# EAGLE board carte_alim (EAGLE 6.5.0)
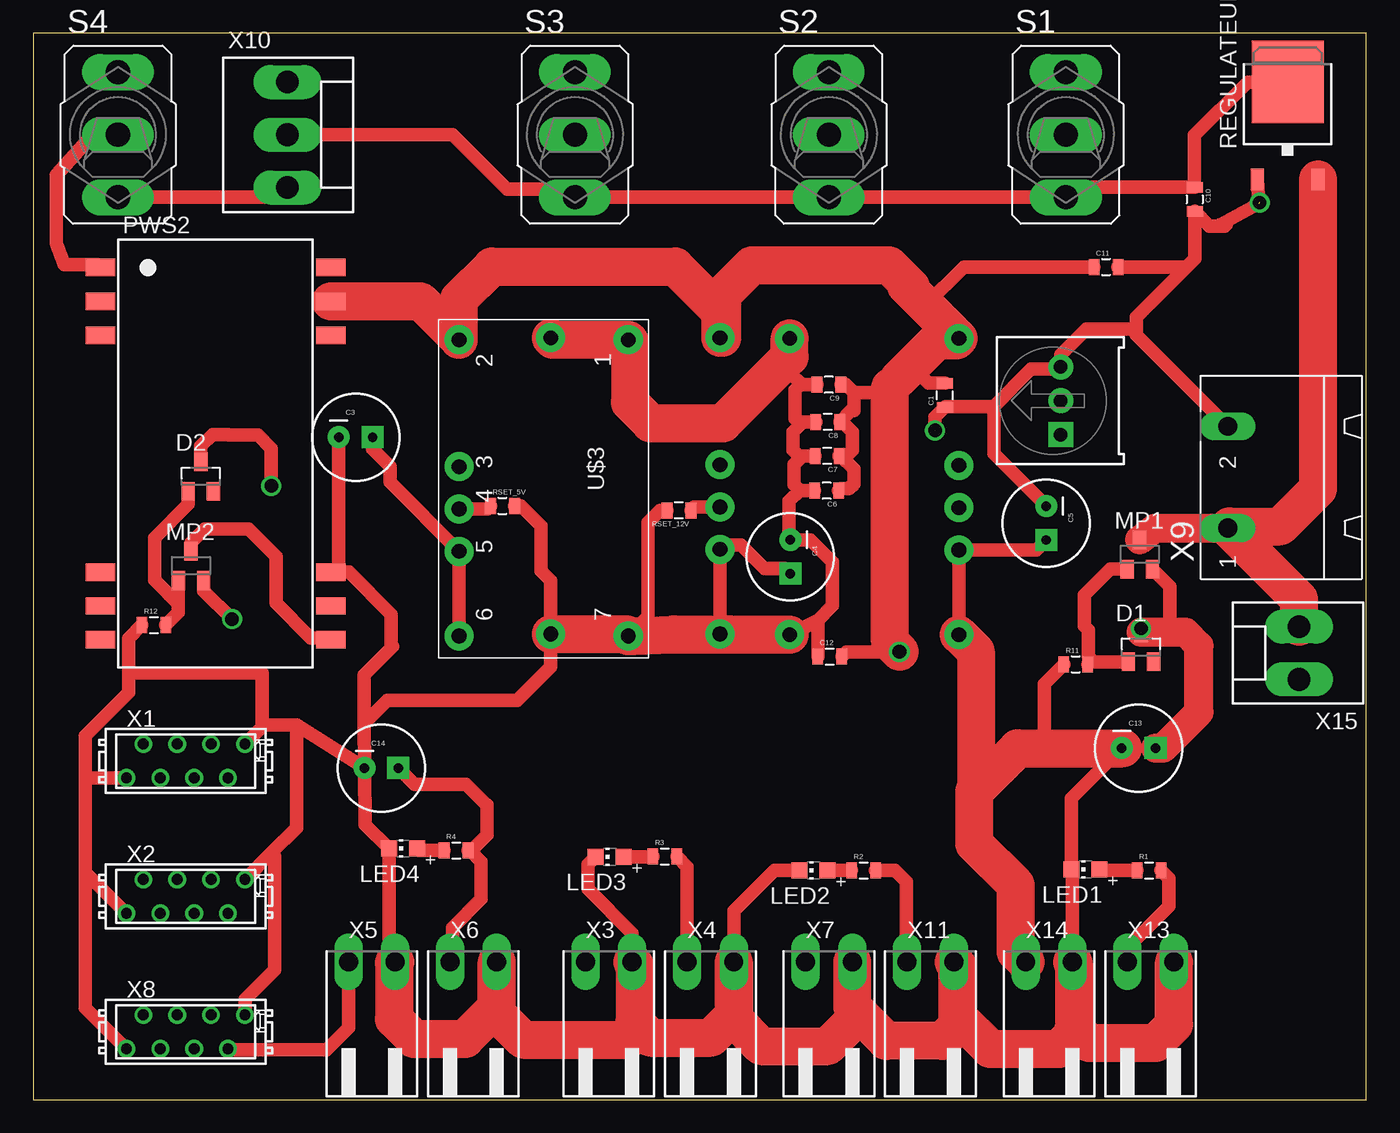
[diagram p0: board, top side]
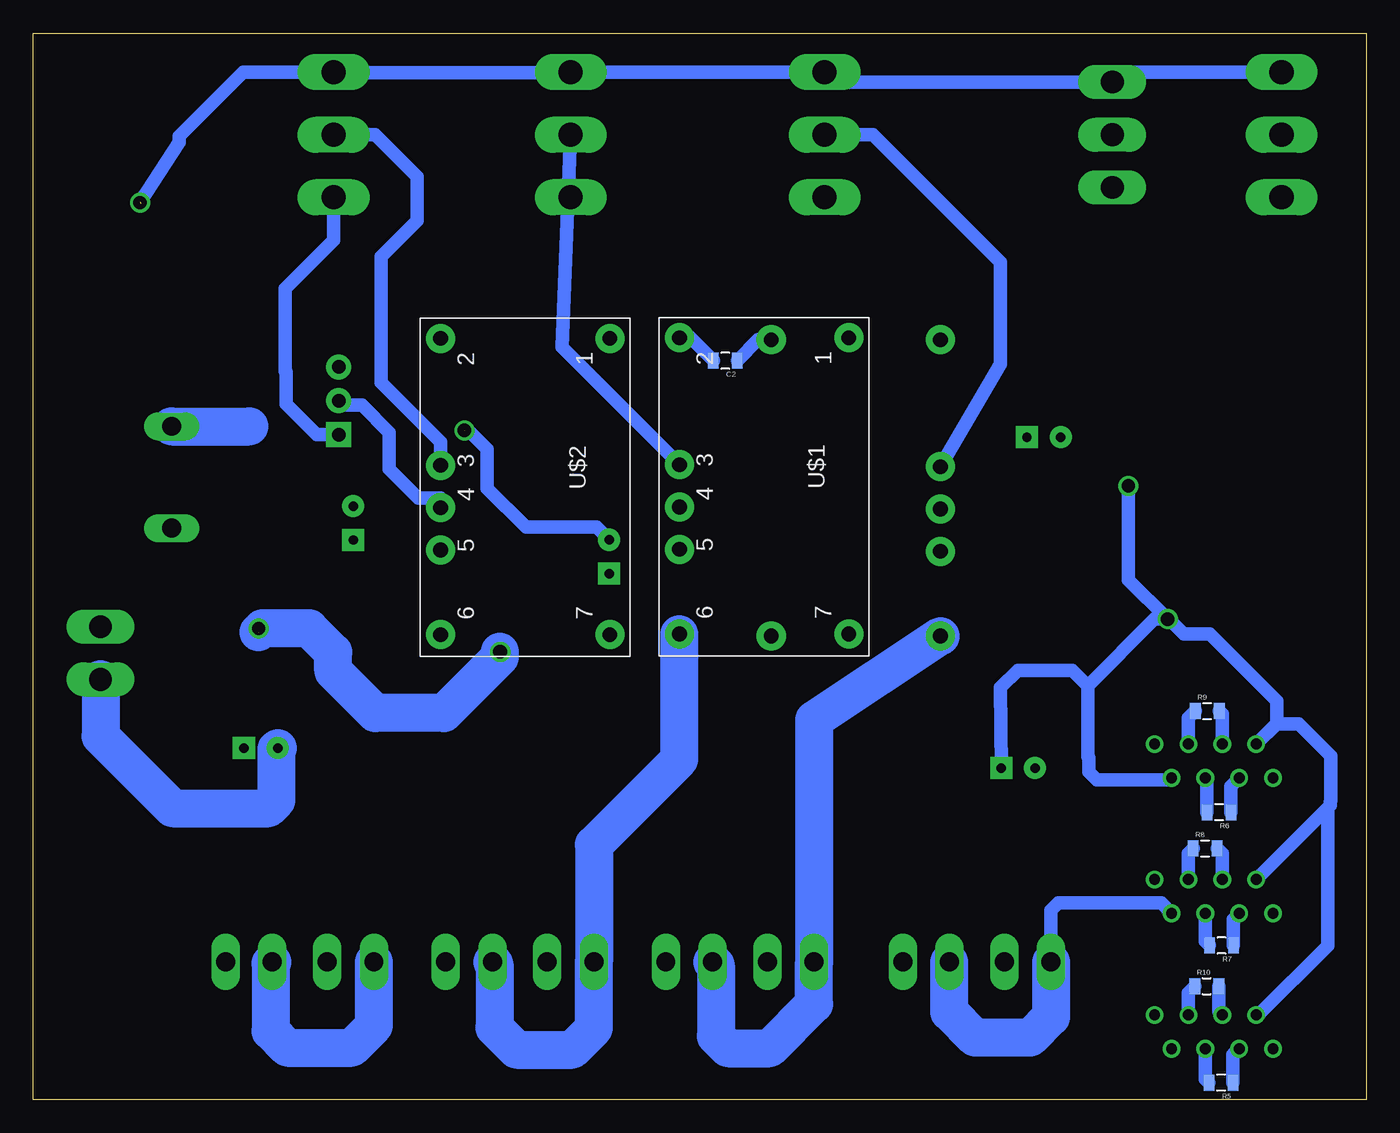
[diagram p1: board, bottom side, seen from below]

Size 100 x 80 mm. Coordinates in mm from the lower left corner, seen from the top.
Outline: 0,0 100,0 100,80 0,80 0,0
Copper layers (1*16): Top 0.035mm / dielectric 1.5mm / Bottom 0.035mm
Design rules "default": minimum track width 10mil, minimum drill 24mil, track to track 8mil, track to pad 8mil, pad to pad 8mil, via to via 8mil, smd to smd 8mil, copper to edge 40mil, drill to drill 8mil, minimum pad ring 10mil, minimum via ring 8mil, stop-mask expansion 4mil, vias tented up to drill 0mil, thermal gap 10mil
Net classes: 0 default: width 1.016 mm, drill 0.6 mm, clearance 0.3 mm; 1 puissance: width 2.86 mm, drill 0.6 mm, clearance 2.86 mm to class 0, clearance 0.073 mm

## Footprints (pad centres in the part's own frame; a part is rotated, then mirrored left to right if it is on the bottom)
0805 = smd 0.8 x 1.2: 1 -0.9,0; 2 0.9,0
CPOL-RADIAL-100UF-25V = drill 0.7 pad 1.651 square: 1 1.27,0 | drill 0.7 pad 1.651: 2 -1.27,0
SOT23 = smd 1 x 1.4: 1 -0.95,-1.1; 2 0.95,-1.1; 3 0,1.1
CHIP-LED0805 = smd 1.2 x 1.2: A 0,-1.05; C 0,1.05
3386U = drill 1.016 pad 1.88 square: 1 -2.54,-0.015 | drill 1.016 pad 1.88: 2 0,-0.015; 3 2.54,-0.015
TES3 = smd 1.3 x 2.2: 1 -13.97,-8.636; 2 -11.43,-8.636; 3 -8.89,-8.636; 10 8.89,-8.636; 11 11.43,-8.636; 12 13.97,-8.636; 13 13.97,8.636; 14 11.43,8.636; 15 8.89,8.636; 22 -8.89,8.636; 23 -11.43,8.636; 24 -13.97,8.636
DPACK = smd 1 x 1.6: 1 -2.28,-4.8; 3 2.28,-4.8 | smd 5.4 x 6.2: 2 0,2.5
M9040P = drill 1.803 long: 1 0,4.699; 2 0,0; 3 0,-4.699
PTN78060WAH = drill 1.1 pad 2.184: 1 -11.176,6.35; 2 -11.176,-6.35; 3 -1.651,-6.35; 4 1.524,-6.35; 5 4.699,-6.35; 6 11.049,-6.35; 7 11.049,6.35
MICROMATCH-8 = drill 0.813: 1 4.445,1.27; 2 3.175,-1.27; 3 1.905,1.27; 4 0.635,-1.27; 5 -0.635,1.27; 6 -1.905,-1.27; 7 -3.175,1.27; 8 -4.445,-1.27
90-2 = drill 1.422 long: 1 -1.75,5.25; 2 1.75,5.25
GMSTBA2 = drill 1.397 long: 1 -3.81,5.08; 2 3.81,5.08
KK-156-3 = drill 1.7 pad 2.184 long: 1 -3.96,0; 2 0,0; 3 3.96,0
KK-156-2 = drill 1.7 pad 2.184 long: 1 -1.98,0; 2 1.98,0

## Placement (x,y rotation side)
C1  2.2uF  [0805]  68.39,52.84 90 top
C2  2.2uF  [0805]  48.08,55.44 180 bottom
C3  330uF  [CPOL-RADIAL-100UF-25V]  24.19,49.69 0 top
C4  330uF  [CPOL-RADIAL-100UF-25V]  56.79,40.73 270 top
C5  330uF  [CPOL-RADIAL-100UF-25V]  75.99,43.25 270 top
C6  4.7uF  [0805]  59.52,45.69 180 top
C7  4.7uF  [0805]  59.56,48.29 180 top
C8  4.7uF  [0805]  59.6,50.84 180 top
C9  4.7uF  [0805]  59.69,53.64 180 top
C10  0.1uF  [0805]  87.13,67.54 270 top
C11  0.33uF  [0805]  80.48,62.46 0 top
C12  2.2uF  [0805]  59.76,33.24 0 top
C13  [CPOL-RADIAL-100UF-25V]  82.93,26.37 0 top
C14  [CPOL-RADIAL-100UF-25V]  26.11,24.87 0 top
D1  [SOT23]  83.1,33.95 0 top
D2  [SOT23]  12.57,46.75 0 top
LED1  [CHIP-LED0805]  78.93,17.27 90 top
LED2  [CHIP-LED0805]  58.53,17.19 90 top
LED3  [CHIP-LED0805]  43.23,18.21 90 top
LED4  [CHIP-LED0805]  27.73,18.83 90 top
MAX=100K  Rset_15v  [3386U]  77.07,52.43 90 top
MP1  [SOT23]  83.01,40.9 0 top
MP2  [SOT23]  11.83,40.05 0 top
PWS2  TES3-1222  [TES3]  13.68,48.46 270 top
R1  2k  [0805]  83.7,17.19 0 top
R2  2k  [0805]  62.29,17.19 0 top
R3  820  [0805]  47.38,18.24 0 top
R4  820  [0805]  31.72,18.69 0 top
R5  120  [0805]  10.89,1.26 180 bottom
R6  120  [0805]  11.05,21.56 180 bottom
R7  120  [0805]  10.86,11.56 180 bottom
R8  120  [0805]  12.08,18.84 0 bottom
R9  120  [0805]  11.92,29.14 0 bottom
R10  120  [0805]  11.96,8.5 0 bottom
R11  100k  [0805]  78.2,32.65 0 top
R12  100k  [0805]  9.04,35.6 0 top
REGULATEUR_5V  MC33269D-5.0  [DPACK]  94.11,73.85 0 top
RSET_5V  21k  [0805]  35.2,44.54 0 top
RSET_12V  734  [0805]  48.44,44.21 180 top
S1  [M9040P]  77.47,72.39 0 top
S2  [M9040P]  59.69,72.39 0 top
S3  [M9040P]  40.64,72.39 0 top
S4  [M9040P]  6.35,72.39 0 top
U$1  PTN78020WAH  [PTN78060WAH]  45.17,45.98 270 bottom
U$2  PTN78020HAH  [PTN78060WAH]  63.09,45.93 270 bottom
U$3  PTN78020WAH  [PTN78060WAH]  38.29,45.83 270 top
X1  MICROMATCH-8  [MICROMATCH-8]  11.43,25.4 0 top
X2  MICROMATCH-8  [MICROMATCH-8]  11.43,15.24 0 top
X3  OUT1_5v  [90-2]  43.18,5.08 0 top
X4  OUT2_5v  [90-2]  50.8,5.08 0 top
X5  OUT1_T5V  [90-2]  25.4,5.08 0 top
X6  OUT2_T5v  [90-2]  33.02,5.08 0 top
X7  OUT1_12v  [90-2]  59.69,5.08 0 top
X8  MICROMATCH-8  [MICROMATCH-8]  11.43,5.08 0 top
X9  IN_batteries  [GMSTBA2]  94.7,46.69 90 top
X10  [KK-156-3]  19.05,72.39 270 top
X11  OUT2_12v  [90-2]  67.31,5.08 0 top
X13  OUT2_15v  [90-2]  83.82,5.08 0 top
X14  OUT1_15v  [90-2]  76.2,5.08 0 top
X15  prise_Voltmetre  [KK-156-2]  94.95,33.5 90 top

## Library data of the parts
C1 C2 C6-C14 R11 R12 RSET_5V RSET_12V = SparkFun-Passives
C3-C5 = SparkFun-Capacitors
D1 D2 = diode
LED1-LED4 = adafruit
MAX=100K = SparkFun-Electromechanical
MP1 MP2 = sym
PWS2 = traco-electronic
R1-R10 = SparkFun-Resistors
REGULATEUR_5V = linear
S1-S4 = switch
U$1-U$3 = ptn78060wah
X1 X2 X8 = con-amp-micromatch; MF: FARNELL; MPN: 7-215464-8; OC_FARNELL: 3784642; OC_NEWARK: 26H0301
X3-X7 X11 X13 X14 = con-weidmueller-sl35; OC_FARNELL: unknown; OC_NEWARK: unknown
X9 = con-phoenix-762; MF: FARNELL; MPN: 1757242; OC_FARNELL: 3705171; OC_NEWARK: 71C4161
X10 X15 = con-molex; OC_FARNELL: unknown; OC_NEWARK: unknown

## Nets
ADJUST_5V: RSET_5V.1 U$3.4
ADJUST_12V: RSET_12V.1 U$1.4
ADJUST_15V: MAX=100K.2 U$2.4
BAT [puissance]: MP1.3 REGULATEUR_5V.3 X9.1 X15.2
GND: C1.1 C2.1 C3.2 C4.2 C5.2 C6.2 C7.2 C8.2 C9.2 C10.2 C11.2 C12.1 C13.2 C14.2 LED1.C LED2.C LED3.C LED4.C MAX=100K.3 PWS2.15 R11.1 R12.1 REGULATEUR_5V.1 RSET_5V.2 RSET_12V.2 S1.1 S2.1 S3.1 S4.1 U$1.1 U$1.7 U$2.1 U$2.7 U$3.1 U$3.7 X1.1 X1.8 X2.1 X2.8 X3.2 X4.2 X5.2 X6.2 X7.2 X8.1 X8.8 X9.2 X10.1 X11.2 X13.2 X14.2 X15.1
GRILLE: D1.1 MP1.1 R11.2
GRILLE_CAN: D2.1 MP2.1 R12.2
H1_1: R7.2 X2.4
H1_2: R8.2 X2.5
H2_1: R6.2 X1.4
H2_2: R9.2 X1.5
H3_1: R5.2 X8.4
H3_2: R10.2 X8.5
L1_1: R7.1 X2.6
L1_2: R8.1 X2.3
L2_1: R6.1 X1.6
L2_2: R9.1 X1.3
L3_1: R5.1 X8.6
L3_2: R10.1 X8.3
N$2 [puissance]: LED1.A R1.1
N$3 [puissance]: LED2.A R2.1
N$4 [puissance]: LED3.A R3.1
N$5: LED4.A R4.1
N$6: PWS2.24
N$9: PWS2.2
N$10: PWS2.10
N$12: PWS2.12
OUT_5V [puissance]: C3.1 R3.2 U$3.5 U$3.6 X3.1 X4.1
OUT_12V [puissance]: C4.1 R2.2 U$1.5 U$1.6 X7.1 X11.1
OUT_15V [puissance]: C5.1 R1.2 U$2.5 U$2.6 X13.1 X14.1
OUT_INTERR_1: S1.2 U$2.3
OUT_INTERR_2: S2.2 U$1.3
OUT_INTERR_3: S3.2 U$3.3
OUT_INTERR_4: PWS2.1 S4.2
OUT_MASTER_INTERR: S4.3 X10.3
OUT_REG: C10.1 MAX=100K.1 REGULATEUR_5V.2 S1.3 S2.3 S3.3 X10.2
OUT_T5V: MP2.3 PWS2.13
OUT_T5V_PROTEGE [puissance]: C14.1 D2.3 MP2.2 R4.2 X1.2 X1.7 X2.2 X2.7 X5.1 X6.1 X8.2 X8.7
VBAT [puissance]: C1.2 C2.2 C6.1 C7.1 C8.1 C9.1 C11.1 C12.2 C13.1 D1.3 MP1.2 PWS2.23 U$1.2 U$2.2 U$3.2

## Tracks (layer width: path | path; a pad name or v marks a point on that pad's centre or on a via)
ADJUST_5V
  Top 1.016: U$3.4 34.07,44.31 RSET_5V.1
ADJUST_12V
  Top 1.016: U$1.4 49.59,44.46 RSET_12V.1
ADJUST_15V
  Bottom 1.016: U$2.4 69.44,45.14 71.14,45.14 73.3,47.3 73.3,50.05 75.35,52.1 76.75,52.1 MAX=100K.2
BAT
  Top 2.184: MP1.3 84.14,42.88 X9.1
  Top 2.86: X15.2 94.95,37.55 X9.1 89.74,43 93.55,43 96.39,45.84 REGULATEUR_5V.3
GND  (2 unrouted)
  Top 1.016: 86.35,62.3 87.13,63.08 C10.2 88.22,65.55 89.4,65.55 89.5,65.65 89.05,65.65 91.95,67.2 REGULATEUR_5V.1 | 86.35,62.3 82.75,58.7 82.75,57.95 | C12.1 58.86,35.96 | 58.86,35.96 U$2.7 | 61.6,9.96 61.44,9.8 | X5.2 26.68,10.8 LED4.C 24.89,20.62 C14.2 | LED3.C 41.6,17.63 41.6,15.8 44.93,12.47 X3.2 | R12.1 7.15,34.61 7.15,32 | 7.15,32 7.15,30.55 3.9,27.3 3.9,24.05 | 3.9,24.05 3.98,24.13 X1.8 | 19.75,28.12 17.32,28.12 X1.1 17.15,27.95 17.15,32 7.15,32 | 19.75,28.12 C14.2 | X2.1 17.86,18.49 | 17.86,18.49 19.75,20.39 19.75,28.12 | X2.8 3.9,17.05 | 3.9,17.05 3.9,24.05 | X8.8 3.9,6.89 3.9,17.05 | PWS2.15 22.85,39.57 | 22.85,39.57 23.68,39.57 26.85,36.4 26.85,33.9 | 26.85,33.9 24.8,31.85 24.8,28.6 | 24.8,28.6 24.8,28.21 C14.2 | 26.95,34 26.85,33.9 | C3.2 22.92,39.64 22.85,39.57 | 82.75,57.95 82.75,57.37 X9.2 | 67.65,50.2 67.65,51.2 C1.1 68.45,52 72.05,52 | X8.1 15.88,7.53 18.1,9.75 18.1,18.25 17.86,18.49 | RSET_5V.2 36.61,44.54 38.1,43.05 38.1,39.65 38.82,38.93 U$1.7 38.82,32.47 36.3,29.95 26.55,29.95 25.2,28.6 24.8,28.6 | RSET_12V.2 47.01,44.21 46.1,43.3 46.1,36.24 U$3.7 | 72.05,52 74.85,54.8 76.92,54.8 MAX=100K.3 77.08,55.88 79,57.8 82.6,57.8 82.75,57.95 | 72.05,52 72.05,48.46 C5.2 | C7.2 57.69,48.29 57.58,48.17 | 57.58,48.17 57.05,47.65 57.05,46.15 57.5,45.7 | 57.5,45.7 C6.2 | C9.2 57.65,53.64 | 57.65,53.64 57.54,53.64 57.15,53.25 57.15,51.1 57.41,50.84 C8.2 57.74,50.84 57,50.1 57,48.75 57.58,48.17 | 57.5,45.7 56.7,44.9 56.7,42.09 C4.2 58.3,42 59.95,40.35 59.95,37.05 58.86,35.96 | U$2.1 56.74,54.55 57.65,53.64 | C11.2 86.19,62.46 86.35,62.3 | X4.2 52.55,14.15 55.59,17.19 LED2.C | R11.1 75.85,31.2 75.85,27.35 76.83,26.37 C13.2 77.88,22.59 LED1.C 77.95,17.2 X14.2
  Top 2.86: X5.2 27.05,10.23 27.05,6.05 28.55,4.55 32.4,4.55 34.77,6.92 X6.2 34.77,6.48 36.75,4.5 44.65,4.5 45.55,5.4 | X3.2 45.1,10.16 45.1,5.85 45.55,5.4 | 45.55,5.4 46.3,4.65 50.85,4.65 52.55,6.35 X4.2 52.55,6.05 54.6,4 59.6,4 62,6.4 | X11.2 69.3,10.09 69.3,6.3 | 69.3,6.3 69.3,5.5 68.2,4.4 64,4.4 62,6.4 | 62,6.4 61.44,6.96 61.44,9.8 X7.2 | X14.2 78.05,10.23 78.05,5.4 78.3,5.15 | 78.3,5.15 79.2,4.25 84.2,4.25 85.57,5.62 X13.2 | U$1.1 38.97,57.01 U$3.1 44.75,56.9 44.75,52.3 46.3,50.75 51.75,50.75 56.74,55.74 U$2.1 | U$1.7 44.49,34.93 U$3.7 44.97,34.78 48.05,34.9 52.26,34.9 U$2.7 | 69.3,6.3 71.8,3.8 76.95,3.8 78.3,5.15
  Bottom 1.016: 91.98,67.35 89.05,71.83 89.05,72.3 84.26,77.09 S1.1 77.43,77.05 59.75,77.05 59.71,77.09 S2.1 S3.1 39.9,76.35 X10.1 18.31,77.09 S4.1 | C2.1 45.61,57.01 U$3.1 | 57.02,34.6 U$2.7 | C4.2 57.74,42.95 63.05,42.95 65.95,45.85 65.95,48.8 67.35,50.2 67.65,50.2
  Bottom 2.86: X15.1 94.95,27.25 89.55,21.85 82.35,21.85 81.75,22.45 81.75,26.28 C13.2 | X9.2 83.8,50.5
GRILLE
  Top 1.016: D1.1 79.55,32.85 | 79.55,32.85 79.3,32.85 R11.2 | MP1.1 80.8,39.8 78.85,37.85 78.85,35.55 79.15,35.25 79.15,33.25 79.55,32.85
GRILLE_CAN
  Top 1.016: MP2.1 10.88,37.2 | 10.88,37.2 10.88,36.54 R12.2 | D2.1 11.62,44.67 9.1,42.15 9.1,38.98 10.88,37.2
H1_1
  Bottom 1.016: R7.2 12.06,11.87 X2.4
H1_2
  Bottom 1.016: R8.2 10.79,18.45 X2.5
H2_1
  Bottom 1.016: X1.4 11.95,24.02 R6.2
H2_2
  Bottom 1.016: R9.2 10.79,28.91 X1.5
H3_1
  Bottom 1.016: R5.2 12.06,1.53 X8.4
H3_2
  Bottom 1.016: X8.5 11.06,6.62 R10.2
L1_1
  Bottom 1.016: X2.6 9.96,13.54 R7.1
L1_2
  Bottom 1.016: R8.1 13.34,18.48 X2.3
L2_1
  Bottom 1.016: X1.6 10.15,23.5 R6.1
L2_2
  Bottom 1.016: R9.1 13.34,28.62 X1.3
L3_1
  Bottom 1.016: X8.6 9.99,3.35 R5.1
L3_2
  Bottom 1.016: R10.1 13.34,8.03 X8.3
N$1  (via drill 1)
  other vias: 92,67.3
N$2
  Top 1.016: LED1.A 80.06,17.19 R1.1
N$3
  Top 1.016: R2.1 LED2.A
N$4
  Top 1.016: R3.1 46.45,18.21 LED3.A
N$5
  Top 1.016: R4.1 28.92,18.69 LED4.A
N$7  (via drill 1)
  other vias: 64.95,33.6
N$8  (via drill 1)
  other vias: 67.65,50.2
N$11  (via drill 1)
  other vias: 83.1,35.35
OUT_5V
  Top 1.016: R3.2 49.05,17.47 X4.1 | C3.1 25.46,48.79 26.75,47.5 26.75,46.32 U$3.5 U$3.6
  Bottom 2.86: X4.1 48.8,10.08 48.8,4.75 47.9,3.85 44.75,3.85 41.43,7.17 X3.1 41.43,28.49 U$3.6
OUT_12V
  Top 1.016: U$1.6 U$1.5 51.85,41.61 53.09,41.61 54.85,39.85 56.4,39.85 C4.1 | X11.1 65.5,10.39 65.5,16.35 64.66,17.19 R2.2
  Bottom 2.86: X11.1 65.4,10.17 65.4,5.4 63.75,3.75 59.55,3.75 57.94,5.36 X7.1 57.94,19.11 51.52,25.53 U$1.6
OUT_15V
  Top 1.016: 82.25,10.51 X13.1 82.07,11.37 85.2,14.5 85.2,16.59 R1.2 | U$2.6 U$2.5 75.24,41.23 C5.1
  Top 2.86: 70.7,23.2 70.6,23.1 70.6,19.2 73.7,16.1 73.7,11.08 X14.1 | 70.7,23.2 73.85,26.35 81.75,26.35 | U$2.6 70.7,33.62 70.7,23.2
  Bottom 2.86: X13.1 82.2,10.2 82.2,5.15 80.95,3.9 76.1,3.9 74.45,5.55 X14.1
OUT_INTERR_1
  Bottom 1.016: S1.2 74.34,72.39 71.2,69.25 71.2,65.95 73.9,63.25 73.9,53.8 69.44,49.34 U$2.3
OUT_INTERR_2
  Bottom 1.016: S2.2 60.34,56.45 U$1.3
OUT_INTERR_3
  Bottom 1.016: S3.2 36.99,72.39 27.45,62.85 27.45,55.17 U$3.3
OUT_INTERR_4
  Top 1.016: S4.2 4.44,72.39 1.7,69.35 1.7,64.25 2.3,62.65 4.82,62.65 PWS2.1
OUT_MASTER_INTERR
  Top 1.016: S4.3 18.31,67.69 X10.3
OUT_REG
  Top 1.016: REGULATEUR_5V.2 91.1,76.35 87.1,72.35 87.1,68.47 C10.1 78.22,68.44 S1.3 S2.3 S3.3 40.03,68.3 35.55,68.3 31.46,72.39 X10.2
  Bottom 1.016: S1.3 77.47,64.48 81.1,60.85 81.1,54.65 81.05,54.6 81.05,52.2 78.74,49.89 MAX=100K.1
OUT_T5V
  Top 1.016: PWS2.13 22.16,34.65 20.8,34.65 18.2,37.25 18.2,40.75 16.15,42.8 12.85,42.8 11.83,41.78 MP2.3
OUT_T5V_PROTEGE  (via drill 1)
  Top 1.016: X8.2 14.66,3.75 22,3.75 23.65,5.4 X5.1 | R4.2 32.76,18.69 | 32.76,18.69 32.89,18.69 34.05,19.85 34.05,22.1 34,22.1 32.45,23.65 28.6,23.65 C14.1 | D2.3 12.57,49.02 13.45,49.9 14.6,49.9 14.65,49.85 16.85,49.85 17.85,48.85 v17.85,46.05 | MP2.2 12.78,38.17 v14.9,36.05 | 32.76,18.69 33.6,17.85 33.6,15.05 31.45,12.9 31.45,10.51 X6.1
  Bottom 1.016: X2.7 2.91,21.86 | 2.91,21.86 2.7,22.07 2.7,22.35 2.65,22.4 2.65,25.79 5.06,28.2 6.72,28.2 X1.7 6.7,28.23 6.7,29.9 11.75,34.95 13.7,34.95 14.8,36.05 v14.9,36.05 | X1.2 14.73,24 20.2,24 20.8,24.6 20.8,25.65 20.9,25.75 20.9,31.05 | v14.9,36.05 15.9,36.05 20.9,31.05 | X5.1 23.65,14.2 23.1,14.75 15.38,14.75 X2.2 | X8.7 8.1,6.35 2.9,11.55 2.9,21.85 2.91,21.86 | v17.85,46.05 17.85,39 v14.9,36.05 | 20.9,31.05 22.05,32.2 26.15,32.2 27.43,30.92 C14.1
  Bottom 2.86: X5.1 23.65,6.2 25.2,4.65 29.35,4.65 31.27,6.57 X6.1
VBAT  (via drill 1)  (1 unrouted)
  Top 1.016: 67.61,57.11 U$2.2 69.29,56.96 | C1.2 67.16,53.74 65.88,55.02 | C9.1 60.96,53.64 61.55,53.05 | 61.55,53.05 61.55,51.7 61.36,51.7 C8.1 60.71,50.84 61.45,50.1 61.45,48.75 61.1,48.4 60.57,48.4 C7.1 60.56,48.29 61.55,47.3 61.55,46.2 61.2,45.85 60.58,45.85 C6.1 | 61.55,53.05 63.9,53.05 64.28,53.42 64.95,54.1 | C11.1 69.81,62.46 66.95,59.6 | C12.2 61.02,33.6 v65,33.6 | MP1.2 85.25,38.51 85.25,35.75 84.55,35.05 D1.3
  Top 2.184: C13.1 84.77,26.37 87.45,29.05 87.45,34.05 86.45,35.05 D1.3
  Top 2.86: 69.29,56.96 67.81,56.96 65.88,55.02 64.95,54.1 | 65.45,61.1 65.85,60.7 | 65.85,60.7 66.95,59.6 U$2.2 | PWS2.23 29.06,59.89 U$3.2 31.94,60.04 34.4,62.5 48.15,62.5 51.52,59.13 U$1.2 51.71,57.16 51.71,60.41 53.9,62.6 64.2,62.6 65.85,60.95 65.85,60.7 | v65,33.6 64.28,34.33 64.28,53.42
  Bottom 1.016: C2.2 50.7,57.16 U$1.2
  Bottom 2.86: D1.3 82.8,35.35 79.3,35.35 77.5,33.55 77.5,32.15 74.35,29 69.2,29 65,33.2 v65,33.6